# Altium PCB Sonar_board.PcbDoc (part 2 of 2)
Units mm, origin at the board's own origin, x right, y up, seen from the top; angles counter-clockwise.
Board outline 152.4 x 101.6 mm, 4 copper layers (Top Layer, Ground Plane, Power Plane, Bottom Layer), stack 0.462 mm thick; 156 components, 157 nets, 762 pads, 215 vias.
Unrouted connection lines stored in the file: 227.
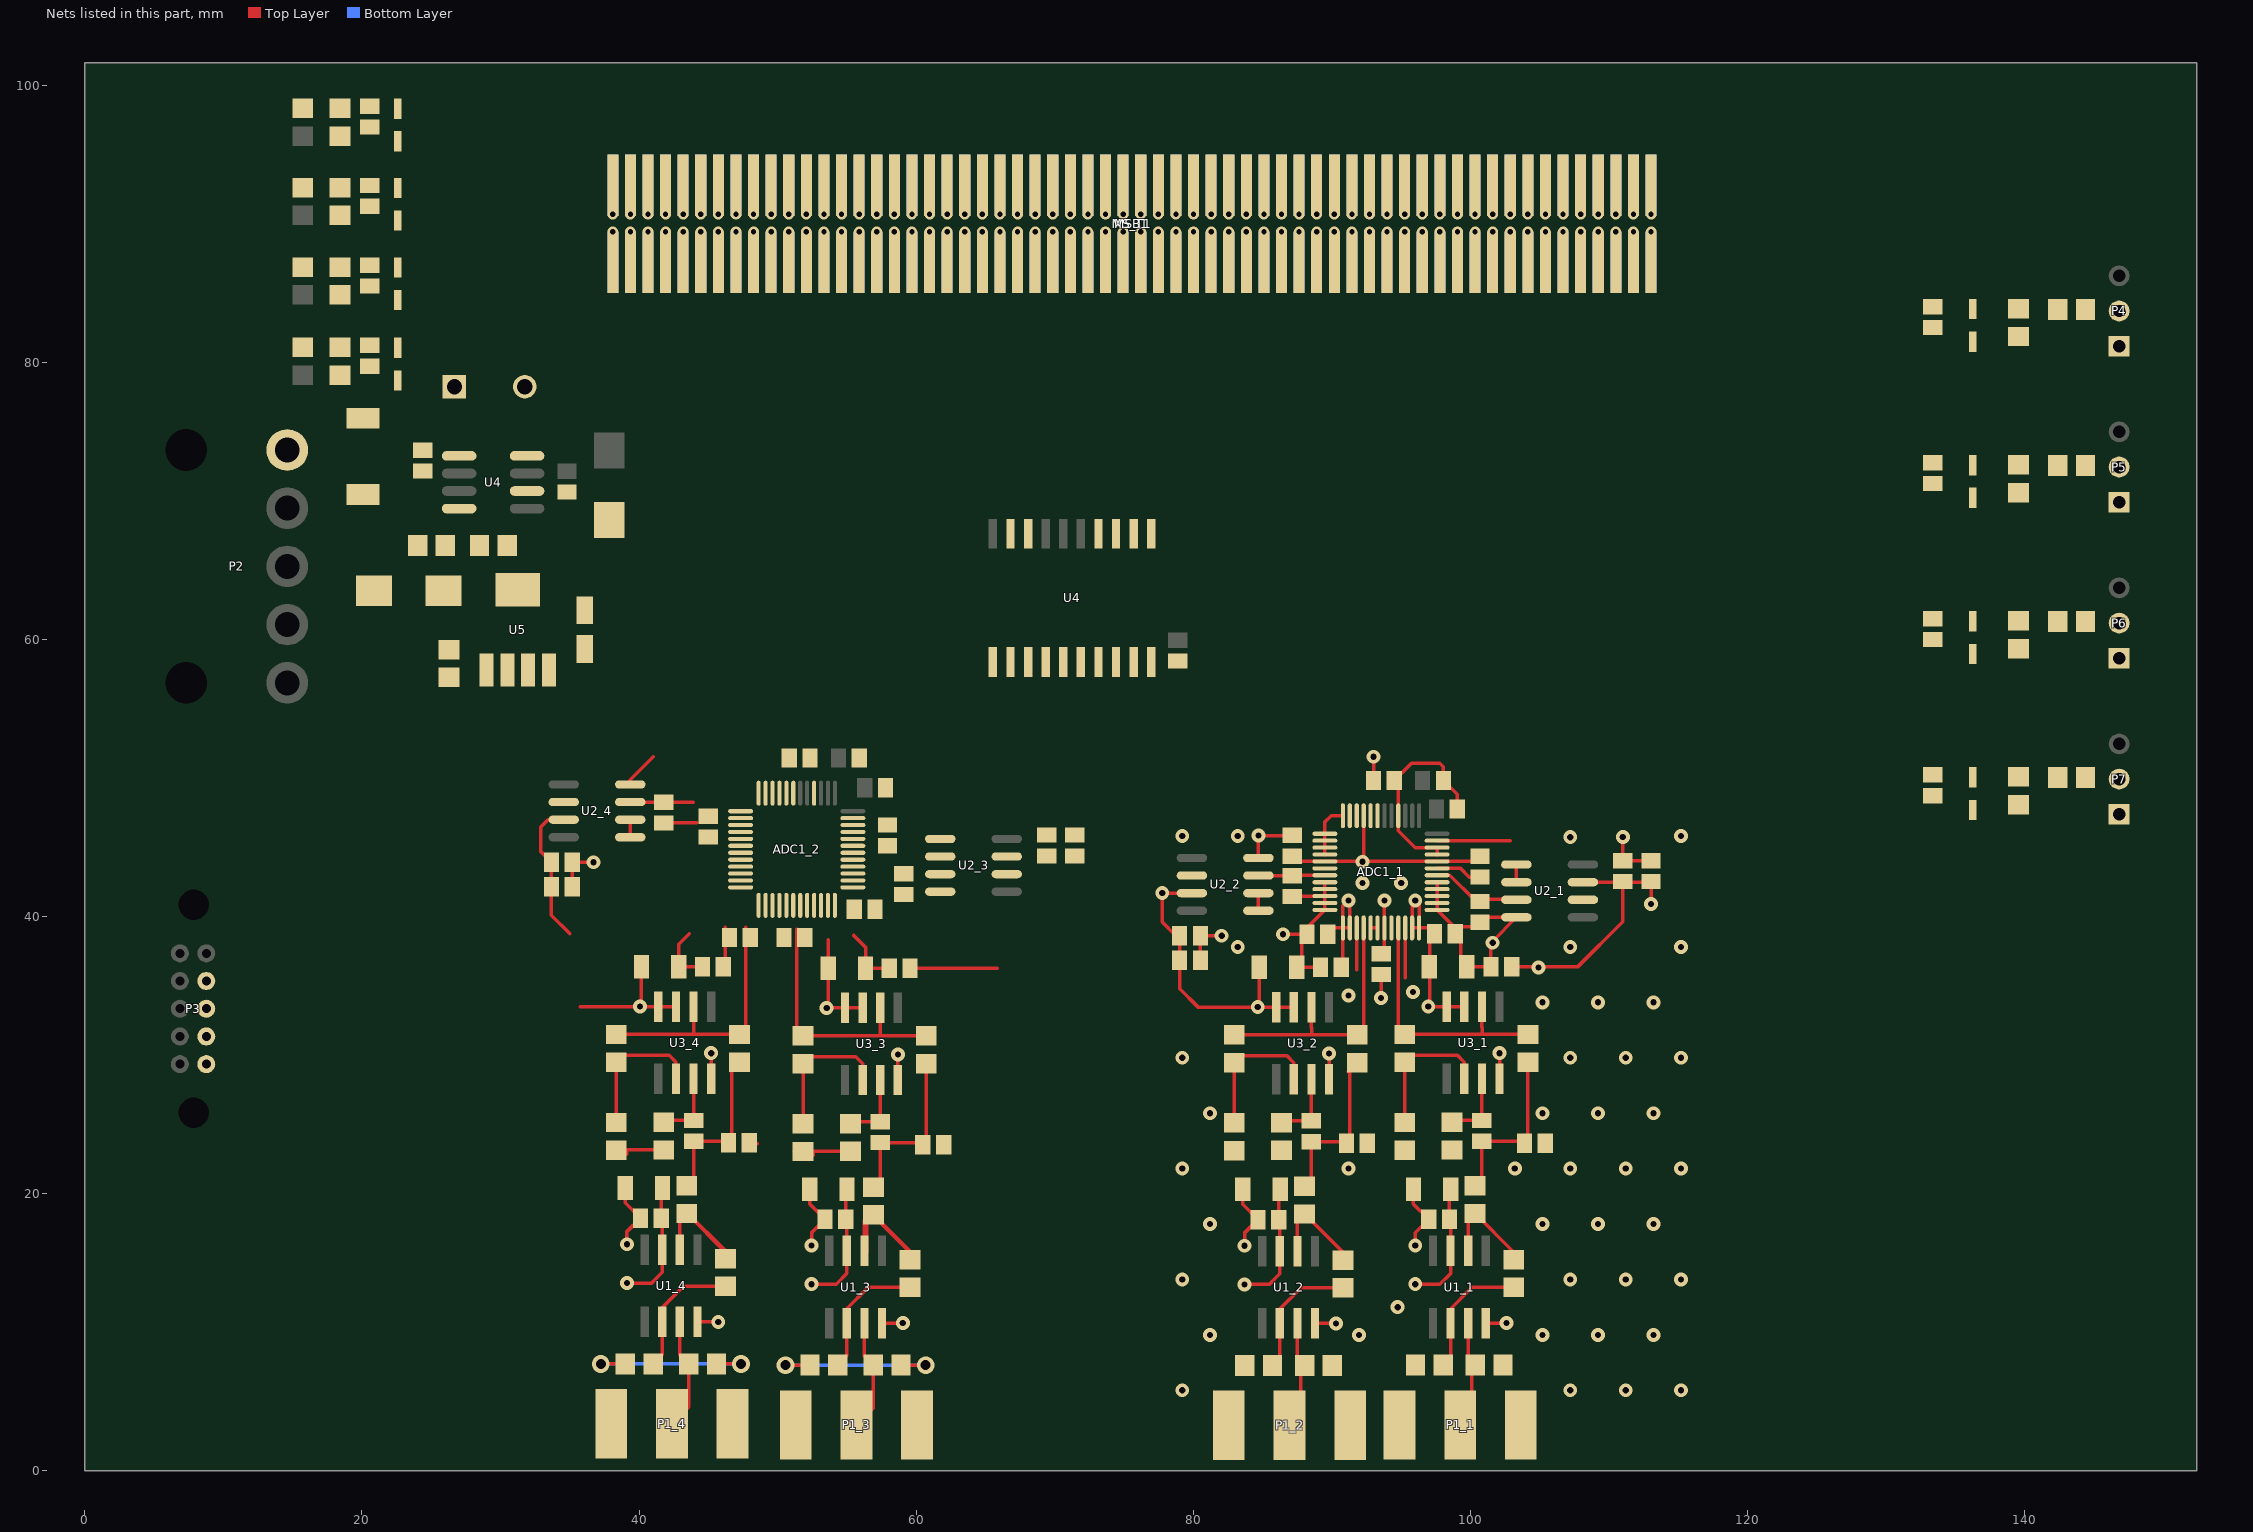
[diagram p4: the nets of this part, all layers, seen from the top]

## Via types
v1: diameter 0.762, hole 0.381, Top Layer to Bottom Layer, 120 vias
v2: diameter 1, hole 0.45, Top Layer to Bottom Layer, 44 vias
v3: diameter 1, hole 0.45, Top Layer to Ground Plane, 22 vias
v4: diameter 1, hole 0.45, Top Layer to Power Plane, 17 vias
v5: diameter 3.556, hole 3.556, Top Layer to Bottom Layer, 4 vias
v6: diameter 1.9, hole 1.9, Top Layer to Bottom Layer, 4 vias
v7: diameter 1.27, hole 0.711, Top Layer to Bottom Layer, 4 vias

## Nets (pads, with @x,y where several pads share a name; then routed paths per layer and width w, separated by ;. In a path a pad name is that pad's centre, name@x,y a point inside that pad or via, vN(x,y) a via of type N, cw(c..) or ccw(c..) an arc to the next point about the centre after c; other vN are vias at no path point) (continued)
DGND: ADC1_1.21 ADC1_1.22 ADC1_1.28 ADC1_1.36 ADC1_1.37 ADC1_1.38 ADC1_1.39 ADC1_1.40 ADC1_2.21 ADC1_2.22 ADC1_2.28 ADC1_2.36 ADC1_2.37 ADC1_2.38 ADC1_2.39 ADC1_2.40 C8_1.1 C8_2.1 C9_1.1 C9_2.1 C10_1.1 C10_2.1 C18.1 MS_T1.1 MS_T1.2 MS_T1.7 MS_T1.8 MS_T1.15 MS_T1.22 MS_T1.29 MS_T1.36 MS_T1.43 MS_T1.50 MS_T1.57 MS_T1.60 MS_T1.61 MS_T1.64 MS_T1.71 MS_T1.78 MS_T1.85 MS_T1.92 MS_T1.99 MS_T1.106 MS_T1.113 MS_T1.114 MS_T1.119 MS_T1.120 MSB1.1 MSB1.2 MSB1.7 MSB1.8 MSB1.15 MSB1.22 MSB1.29 MSB1.36 MSB1.43 MSB1.50 MSB1.57 MSB1.60 MSB1.61 MSB1.64 MSB1.71 MSB1.78 MSB1.85 MSB1.92 MSB1.99 MSB1.106 MSB1.113 MSB1.114 MSB1.119 MSB1.120 U4.3@68.072,58.367 U4.4@69.342,58.367 U4.5@70.612,58.367 U4.10 | length 19
  Top Layer w0.254: ADC1_1.40@89.491,44.468 ADC1_1.39@89.491,44.968 ADC1_1.38@89.491,45.468 ADC1_1.37@89.491,45.968 89.491,46.819 89.94,47.268 ADC1_1.36@90.791,47.268 ; ADC1_1.21@97.591,44.468 ADC1_1.22@97.591,44.968 96.002,44.968 94.791,46.179 ADC1_1.28@94.791,47.268 94.791,49.518 C8_1.1@94.501,49.808 95.747,51.054 97.79,51.054 98.045,50.799 C9_1.1@98.045,49.808 99.048,48.805 C10_1.1@99.048,47.752
  other v1: 38.1,89.408 41.91,89.408 50.8,89.408 59.69,89.408 68.58,89.408 77.47,89.408 86.36,89.408 95.25,89.408 104.14,89.408 105.41,89.408 111.76,89.408 113.03,89.408 38.1,90.678 41.91,90.678 50.8,90.678 59.69,90.678 68.58,90.678 77.47,90.678 86.36,90.678 95.25,90.678 104.14,90.678 105.41,90.678 111.76,90.678 113.03,90.678
GND: ADC1_1.5 ADC1_1.6 ADC1_1.8 ADC1_1.13 ADC1_1.14 ADC1_1.15 ADC1_1.16 ADC1_1.17 ADC1_1.19 ADC1_1.42 ADC1_1.44 ADC1_1.45 ADC1_1.46 ADC1_1.47 ADC1_1.48 ADC1_2.5 ADC1_2.6 ADC1_2.8 ADC1_2.13 ADC1_2.14 ADC1_2.15 ADC1_2.16 ADC1_2.17 ADC1_2.19 ADC1_2.42 ADC1_2.44 ADC1_2.45 ADC1_2.46 ADC1_2.47 ADC1_2.48 C1_1.1 C1_2.1 C1_3.1 C1_4.1 C2_1.1 C2_2.1 C2_3.1 C2_4.1 C3_1.1 C3_2.1 C4_1.1 C4_2.1 C5_1.1 C5_2.1 C6_1.1 C6_2.1 C7_1.1 C7_2.1 C11_1.1 C11_2.1 C11_3.1 C11_4.1 C12_1.1 C12_2.1 C12_3.1 C12_4.1 C13_1.1 C13_2.1 C13_3.1 C13_4.1 C14_1.1 C14_2.1 C14_3.1 C14_4.1 C15_1.1 C15_2.1 C15_3.1 C15_4.1 C21.1@34.798,70.624 C22.2 C23.2 C24.1@133.36,82.499 C24.2@36.068,62.106 C25.1 C26.1 C27.1 C28.1 C29.1 C30.1 C31.1 D1.3 D2.1 D3.1 D4.1 D5.1 D6.1 D7.1 D8.1 D9.1 P2.1 P3.10 P4.1 P5.1 P6.1 P7.1 R8.1 R13.1 R16.1 R17.1 R20.1 R21.1 R23.1 R25.1 R27.1 U1_1.4 U1_2.4 U1_3.4 U1_4.4 U2_1.4 U2_2.4 U2_3.4 U2_4.4 U3_1.4 U3_2.4 U3_3.4 U3_4.4 U4.6@31.914,70.699 U5.5 | length 97.9
  Top Layer w0.254: C12_4.1@35.167,42.132 C11_4.1@35.167,43.91 v3(36.703,43.91) ; C2_4.1@38.991,20.4 38.991,19.33 C1_4.1@40.093,18.228 39.122,17.257 v3(39.122,16.336) ; U2_4.4@39.357,49.523 39.357,49.866 41.009,51.518 ; C13_4.1@41.812,46.77 44.152,46.77 ; 43.607,38.744 42.867,38.004 C15_4.1@42.867,36.354 C14_4.1@44.577,36.354 ; U1_4.4@44.212,10.735 v3(45.713,10.735) ; U3_4.4@45.2,28.293 v3(45.2,30.131) ; C2_3.1@52.31,20.32 52.31,19.25 C1_3.1@53.412,18.148 52.441,17.177 v3(52.441,16.256) ; 55.474,38.636 56.341,37.769 C15_3.1@56.341,36.255 C14_3.1@58.051,36.255 ; U1_3.4@57.531,10.655 v3(59.032,10.655) ; U3_3.4@58.674,28.194 v3(58.674,30.032) ; C12_2.1@80.506,36.83 C11_2.1@80.506,38.608 v3(82.042,38.608) ; C2_2.1@83.562,20.295 83.562,19.225 C1_2.1@84.664,18.123 83.693,17.152 v3(83.693,16.231) ; U2_2.4@84.696,44.221 v3(84.696,45.834) 86.994,45.834 C4_1.1@87.122,45.962 ; v3(86.464,38.712) C3_1.1@88.196,38.712 ; C13_2.1@87.151,41.468 ADC1_1.46@89.491,41.468 ; C3_1.1@87.884,38.4 C3_1.1@88.196,38.712 ; U1_2.4@88.783,10.63 v3(90.284,10.63) ; C14_2.1@89.166,36.322 C15_2.1@87.456,36.322 87.82,37 87.82,38.4 C3_1.1@88.196,38.712 ; ADC1_1.44@89.491,42.468 ADC1_1.45@89.491,41.968 ADC1_1.46@89.491,41.468 ; U3_2.4@89.789,28.261 v3(89.789,30.099) ; ADC1_1.5@92.791,39.168 ADC1_1.6@93.283,39.168 ; v3(93.548,34.112) C6_1.1@93.548,35.806 ; C2_1.1@95.881,20.32 95.881,19.25 C1_1.1@96.983,18.148 96.012,17.177 v3(96.012,16.256) ; ADC1_1.17@97.591,42.468 ADC1_1.16@97.591,41.968 ADC1_1.15@97.591,41.468 ADC1_1.14@97.591,40.968 ADC1_1.13@97.591,40.468 C5_1.1@98.896,39.163 ; ADC1_1.19@97.591,43.468 99.28,43.468 99.91,42.838 C7_1.1@100.684,42.838 ; C5_1.1@98.896,39.116 C5_1.1@98.896,38.735 99.31,38.33 99.31,36.817 C15_1.1@99.73,36.354 99.763,36.354 C14_1.1@101.473,36.354 v3@101.473,38.093 ; C5_1.1@98.896,39.246 C13_1.1@100.683,39.246 ; C13_1.1@100.683,39.401 100.683,39.932 U2_1.4@103.312,39.932 v3@101.6,38.22 ; U1_1.4@101.102,10.655 v3(102.603,10.655) ; U3_1.4@102.096,28.293 v3(102.096,30.131) ; v3(110.996,45.724) C11_1.1@110.996,44.016 C12_1.1@113.028,44.016 ; C3_1.1@88.196,38.712 88.196,39.173 ADC1_1.48@89.491,40.468 ADC1_1.47@89.491,40.968 ADC1_1.46@89.491,41.468
  other v3: 101.6,38.1 92.202,42.418 94.996,42.418
NetADC1_1_3: ADC1_1.3 C16_2.2 P1_2.2 R2_2.1 R3_2.2 R4_2.1 R6_2.2 U2_2.6 | length 3
  Top Layer w0.254: 91.791,36.165 ADC1_1.3@91.791,39.168
  other v2: 79.2,5.8 81.2,9.8 91.948,9.8 79.2,13.8 81.2,17.8 79.2,21.8 91.2,21.8 81.2,25.8 79.2,29.8 91.186,34.29 83.2,37.8 79.2,45.8 83.2,45.8
NetADC1_1_4: ADC1_1.4 R5_2.2 R8_2.2 U3_2.6 | length 18.8
  Top Layer w0.254: R5_2.2@82.943,31.448 88.531,31.448 ; U3_2.6@88.519,33.461 88.519,31.968 88.531,31.956 88.531,31.448 ; ADC1_1.4@92.291,39.168 92.291,31.906 R8_2.2@91.833,31.448 88.531,31.448
NetADC1_1_9: ADC1_1.9 R5_1.2 R8_1.2 U3_1.6 | length 18.8
  Top Layer w0.254: ADC1_1.9@94.791,39.168 94.791,31.939 R5_1.2@95.25,31.48 100.838,31.48 ; U3_1.6@100.826,33.493 100.826,32 100.838,31.988 100.838,31.48 ; R8_1.2@104.14,31.48 100.838,31.48
NetADC1_1_10: ADC1_1.10 C16_1.2 P1_1.2 R2_1.1 R3_1.2 R4_1.1 R6_1.2 U2_1.6 | length 3.6
  Top Layer w0.254: 95.291,35.56 ADC1_1.10@95.291,39.168
  other v2: 107.2,5.8 111.2,5.8 115.2,5.8 105.2,9.8 109.2,9.8 113.2,9.8 94.742,11.8 107.2,13.8 111.2,13.8 115.2,13.8 105.2,17.8 109.2,17.8 113.2,17.8 103.2,21.8 107.2,21.8 111.2,21.8 115.2,21.8 105.2,25.8 109.2,25.8 113.2,25.8 107.2,29.8 111.2,29.8 115.2,29.8 105.2,33.8 109.2,33.8 113.2,33.8 95.85,34.55 107.2,37.8 115.2,37.8 107.2,45.72 115.2,45.8
NetADC1_1_18: ADC1_1.18 C13_1.2 U2_1.3 | length 6.3
  Top Layer w0.254: ADC1_1.18@97.591,42.968 98.51,42.968 C13_1.2@100.33,41.148 ; C13_1.2@100.403,41.075 C13_1.2@100.683,41.075 ; C13_1.2@100.683,41.222 U2_1.3@103.165,41.222
NetADC1_1_23: ADC1_1.23 MS_T1.98 MSB1.23 | length 5.3
  Top Layer w0.254: ADC1_1.23@97.591,45.468 102.872,45.468
  other v1: 85.09,89.408
NetADC1_1_31: ADC1_1.31 U4.9
NetADC1_1_32: ADC1_1.32 U4.8@74.422,58.367
NetADC1_1_34: ADC1_1.34 MS_T1.96 MSB1.25
  other v1: 82.55,89.408
NetADC1_1_35: ADC1_1.35 MS_T1.97 MSB1.24
  other v1: 83.82,89.408
NetADC1_1_43: ADC1_1.43 C13_2.2 U2_2.3 | length 4.8
  Top Layer w0.254: U2_2.3@84.708,42.939 C13_2.2@87.122,42.939 ; C13_2.2@87.151,42.968 ADC1_1.43@89.491,42.968
NetADC1_2_3: ADC1_2.3 C16_4.2 P1_4.2 R2_4.1 R3_4.2 R4_4.1 R6_4.2 U2_4.6 | length 18
  Top Layer w0.254: v7(37.242,7.7) R2_4.1@39.011,7.7 ; R4_4.1@37.723,23.13 R4_4.1@38.354,23.13 R4_4.1@37.846,22.622 ; R4_4.1@39.104,22.848 39.104,23.146 R6_4.2@41.771,23.146 ; R3_4.2@45.583,7.7 v7(47.352,7.7) ; C16_4.2@48.502,23.622 48.514,23.61
  Bottom Layer w0.254: v7(37.242,7.7) v7(47.352,7.7)
NetADC1_2_4: ADC1_2.4 R5_4.2 R8_4.2 U3_4.6 | length 18.7
  Top Layer w0.254: R5_4.2@37.895,31.939 R5_4.2@38.354,31.48 ; 39.116,31.48 43.942,31.48 ; U3_4.6@43.93,33.493 43.93,32 43.942,31.988 43.942,31.48 ; 47.702,39.2 47.702,31.938 R8_4.2@47.244,31.48 43.942,31.48
NetADC1_2_9: ADC1_2.9 R5_3.2 R8_3.2 U3_3.6 | length 18.7
  Top Layer w0.254: 51.369,39.069 51.369,31.84 R5_3.2@51.828,31.381 ; 52.59,31.381 57.416,31.381 ; U3_3.6@57.404,33.394 57.404,31.901 57.416,31.889 57.416,31.381 ; R8_3.2@61.176,31.839 R8_3.2@60.718,31.381 57.416,31.381
NetADC1_2_10: ADC1_2.10 C16_3.2 P1_3.2 R2_3.1 R3_3.2 R4_3.1 R6_3.2 U2_3.6 | length 18
  Top Layer w0.254: v7(50.561,7.62) R2_3.1@52.33,7.62 ; R4_3.1@51.197,23.031 R4_3.1@51.828,23.031 R4_3.1@51.32,22.523 ; R4_3.1@52.578,22.749 52.578,23.047 R6_3.2@55.245,23.047 ; R3_3.2@58.902,7.62 v7(60.671,7.62) ; C16_3.2@61.976,23.523 C16_3.2@61.988,23.511
  Bottom Layer w0.254: v7(50.561,7.62) v7(60.671,7.62)
NetADC1_2_18: ADC1_2.18 C13_3.2 U2_3.3
NetADC1_2_23: ADC1_2.23 MS_T1.87 MSB1.34
  other v1: 71.12,89.408
NetADC1_2_31: ADC1_2.31 U4.7@73.152,58.367
NetADC1_2_32: ADC1_2.32 U4.6@71.882,58.367
NetADC1_2_34: ADC1_2.34 MS_T1.84 MSB1.37
  other v1: 67.31,89.408
NetADC1_2_35: ADC1_2.35 MS_T1.86 MSB1.35
  other v1: 69.85,89.408
NetADC1_2_43: ADC1_2.43 C13_4.2 U2_4.3 | length 4.5
  Top Layer w0.254: U2_4.3@39.369,48.241 C13_4.2@41.783,48.241 43.894,48.241
NetC16_1_1: C16_1.1 C17_1.2 R7_1.2 R8_1.1 | length 11.7
  Top Layer w0.254: R7_1.2@100.33,20.558 100.826,21.054 C17_1.2@100.826,23.777 103.743,23.777 104.14,24.174 R8_1.1@104.14,28.972
NetC16_2_1: C16_2.1 C17_2.2 R7_2.2 R8_2.1 | length 12
  Top Layer w0.254: R7_2.2@88.023,20.526 88.519,21.022 C17_2.2@88.519,23.745 91.055,23.745 91.286,23.976 R8_2.1@91.286,28.801 ; R8_2.1@91.186,28.801 R8_2.1@91.833,29.448
NetC16_3_1: C16_3.1 C17_3.2 R7_3.2 R8_3.1 | length 11.7
  Top Layer w0.254: R7_3.2@56.908,20.459 57.404,20.955 C17_3.2@57.404,23.678 60.321,23.678 60.718,24.075 R8_3.1@60.718,28.873
NetC16_4_1: C16_4.1 C17_4.2 R7_4.2 R8_4.1 | length 12
  Top Layer w0.254: R7_4.2@43.434,20.558 43.93,21.054 C17_4.2@43.93,23.777 46.466,23.777 46.697,24.008 R8_4.1@46.697,28.833 ; R8_4.1@46.597,28.833 R8_4.1@47.244,29.48
NetC17_1_1: C17_1.1 R6_1.1 U3_1.3 | length 5
  Top Layer w0.254: R6_1.1@98.798,25.277 C17_1.1@100.826,25.277 U3_1.3@100.826,28.293
NetC17_2_1: C17_2.1 R6_2.1 U3_2.3 | length 5
  Top Layer w0.254: R6_2.1@86.491,25.245 C17_2.1@88.519,25.245 U3_2.3@88.519,28.261
NetC17_3_1: C17_3.1 R6_3.1 U3_3.3 | length 5
  Top Layer w0.254: R6_3.1@55.376,25.178 C17_3.1@57.404,25.178 U3_3.3@57.404,28.194
NetC17_4_1: C17_4.1 R6_4.1 U3_4.3 | length 5
  Top Layer w0.254: R6_4.1@41.902,25.277 C17_4.1@43.93,25.277 U3_4.3@43.93,28.293
NetC21_1: C21.1@24.384,72.148 U4.1@27.014,73.239
NetC21_2: C21.2@24.384,73.648 D1.1 L1.1 U4.8@31.914,73.239
NetC23_1: C23.1 L1.2 R6.2 R7.1 U5.2
NetC24_2: C24.2@133.36,83.999 D2.2 MS_T1.118 MSB1.3 R12.2 R13.2
  other v1: 110.49,89.408
NetC25_2: C25.2 D3.2 MS_T1.3 MSB1.118 R14.2 R16.2
  other v1: 110.49,90.678
NetC26_2: C26.2 D4.2 MS_T1.117 MSB1.4 R15.2 R17.2
  other v1: 109.22,89.408
NetC27_2: C27.2 D5.2 MS_T1.4 MSB1.117 R18.2 R20.2
  other v1: 109.22,90.678
NetC28_2: C28.2 D6.2 MS_T1.116 MSB1.5 R19.2 R21.2
  other v1: 107.95,89.408
NetC29_2: C29.2 D7.2 MS_T1.5 MSB1.116 R22.2 R23.2
  other v1: 107.95,90.678
NetC30_2: C30.2 D8.2 MS_T1.115 MSB1.6 R24.2 R25.2
  other v1: 106.68,89.408
NetC31_2: C31.2 D9.2 MS_T1.6 MSB1.115 R26.2 R27.2
  other v1: 106.68,90.678
NetMS_T1_9: MS_T1.9 MSB1.112
  other v1: 102.87,90.678
NetMS_T1_10: MS_T1.10 MSB1.111
  other v1: 101.6,90.678
NetMS_T1_11: MS_T1.11 MSB1.110
  other v1: 100.33,90.678
NetMS_T1_12: MS_T1.12 MSB1.109
  other v1: 99.06,90.678
NetMS_T1_13: MS_T1.13 MSB1.108
  other v1: 97.79,90.678
NetMS_T1_14: MS_T1.14 MSB1.107
  other v1: 96.52,90.678
NetMS_T1_16: MS_T1.16 MSB1.105
  other v1: 93.98,90.678
NetMS_T1_17: MS_T1.17 MSB1.104
  other v1: 92.71,90.678
NetMS_T1_18: MS_T1.18 MSB1.103
  other v1: 91.44,90.678
NetMS_T1_19: MS_T1.19 MSB1.102
  other v1: 90.17,90.678
NetMS_T1_20: MS_T1.20 MSB1.101
  other v1: 88.9,90.678
NetMS_T1_21: MS_T1.21 MSB1.100
  other v1: 87.63,90.678
NetMS_T1_23: MS_T1.23 MSB1.98
  other v1: 85.09,90.678
NetMS_T1_24: MS_T1.24 MSB1.97
  other v1: 83.82,90.678
NetMS_T1_25: MS_T1.25 MSB1.96
  other v1: 82.55,90.678
NetMS_T1_26: MS_T1.26 MSB1.95
  other v1: 81.28,90.678
NetMS_T1_27: MS_T1.27 MSB1.94
  other v1: 80.01,90.678
NetMS_T1_28: MS_T1.28 MSB1.93
  other v1: 78.74,90.678
NetMS_T1_30: MS_T1.30 MSB1.91
  other v1: 76.2,90.678
NetMS_T1_31: MS_T1.31 MSB1.90
  other v1: 74.93,90.678
NetMS_T1_32: MS_T1.32 MSB1.89
  other v1: 73.66,90.678
NetMS_T1_33: MS_T1.33 MSB1.88
  other v1: 72.39,90.678
NetMS_T1_34: MS_T1.34 MSB1.87
  other v1: 71.12,90.678
NetMS_T1_35: MS_T1.35 MSB1.86
  other v1: 69.85,90.678
NetMS_T1_37: MS_T1.37 MSB1.84
  other v1: 67.31,90.678
NetMS_T1_38: MS_T1.38 MSB1.83
  other v1: 66.04,90.678
NetMS_T1_39: MS_T1.39 MSB1.82
  other v1: 64.77,90.678
NetMS_T1_40: MS_T1.40 MSB1.81
  other v1: 63.5,90.678
NetMS_T1_41: MS_T1.41 MSB1.80
  other v1: 62.23,90.678
NetMS_T1_42: MS_T1.42 MSB1.79
  other v1: 60.96,90.678
NetMS_T1_44: MS_T1.44 MSB1.77
  other v1: 58.42,90.678
NetMS_T1_45: MS_T1.45 MSB1.76
  other v1: 57.15,90.678
NetMS_T1_46: MS_T1.46 MSB1.75
  other v1: 55.88,90.678
NetMS_T1_47: MS_T1.47 MSB1.74
  other v1: 54.61,90.678
NetMS_T1_48: MS_T1.48 MSB1.73
  other v1: 53.34,90.678
NetMS_T1_49: MS_T1.49 MSB1.72
  other v1: 52.07,90.678
NetMS_T1_51: MS_T1.51 MSB1.70
  other v1: 49.53,90.678
NetMS_T1_52: MS_T1.52 MSB1.69
  other v1: 48.26,90.678
NetMS_T1_53: MS_T1.53 MSB1.68
  other v1: 46.99,90.678
NetMS_T1_54: MS_T1.54 MSB1.67
  other v1: 45.72,90.678
NetMS_T1_55: MS_T1.55 MSB1.66
  other v1: 44.45,90.678
NetMS_T1_56: MS_T1.56 MSB1.65
  other v1: 43.18,90.678
NetMS_T1_58: MS_T1.58 MSB1.63
  other v1: 40.64,90.678
NetMS_T1_59: MS_T1.59 MSB1.62
  other v1: 39.37,90.678
NetMS_T1_62: MS_T1.62 MSB1.59
  other v1: 39.37,89.408
NetMS_T1_63: MS_T1.63 MSB1.58
  other v1: 40.64,89.408
NetMS_T1_65: MS_T1.65 MSB1.56
  other v1: 43.18,89.408
NetMS_T1_66: MS_T1.66 MSB1.55
  other v1: 44.45,89.408
NetMS_T1_67: MS_T1.67 MSB1.54
  other v1: 45.72,89.408
NetMS_T1_68: MS_T1.68 MSB1.53
  other v1: 46.99,89.408
NetMS_T1_69: MS_T1.69 MSB1.52
  other v1: 48.26,89.408
NetMS_T1_70: MS_T1.70 MSB1.51
  other v1: 49.53,89.408
NetMS_T1_72: MS_T1.72 MSB1.49
  other v1: 52.07,89.408
NetMS_T1_73: MS_T1.73 MSB1.48
  other v1: 53.34,89.408
NetMS_T1_74: MS_T1.74 MSB1.47
  other v1: 54.61,89.408
NetMS_T1_75: MS_T1.75 MSB1.46
  other v1: 55.88,89.408
NetMS_T1_76: MS_T1.76 MSB1.45
  other v1: 57.15,89.408
NetMS_T1_77: MS_T1.77 MSB1.44
  other v1: 58.42,89.408
NetMS_T1_79: MS_T1.79 MSB1.42
  other v1: 60.96,89.408
NetMS_T1_80: MS_T1.80 MSB1.41
  other v1: 62.23,89.408
NetMS_T1_81: MS_T1.81 MSB1.40
  other v1: 63.5,89.408
NetMS_T1_82: MS_T1.82 MSB1.39 P3.9
  other v1: 64.77,89.408
NetMS_T1_83: MS_T1.83 MSB1.38 P3.7
  other v1: 66.04,89.408
NetMS_T1_88: MS_T1.88 MSB1.33 U4.18
  other v1: 72.39,89.408
NetMS_T1_89: MS_T1.89 MSB1.32 U4.14
  other v1: 73.66,89.408
NetMS_T1_90: MS_T1.90 MSB1.31 U4.19
  other v1: 74.93,89.408
NetMS_T1_91: MS_T1.91 MSB1.30 U4.13
  other v1: 76.2,89.408
NetMS_T1_93: MS_T1.93 MSB1.28 U4.12
  other v1: 78.74,89.408
NetMS_T1_94: MS_T1.94 MSB1.27 U4.1@65.532,58.367
  other v1: 80.01,89.408
NetMS_T1_95: MS_T1.95 MSB1.26 U4.11
  other v1: 81.28,89.408
NetMS_T1_100: MS_T1.100 MSB1.21
  other v1: 87.63,89.408
NetMS_T1_101: MS_T1.101 MSB1.20
  other v1: 88.9,89.408
NetMS_T1_102: MS_T1.102 MSB1.19
  other v1: 90.17,89.408
NetMS_T1_103: MS_T1.103 MSB1.18
  other v1: 91.44,89.408
NetMS_T1_104: MS_T1.104 MSB1.17
  other v1: 92.71,89.408
NetMS_T1_105: MS_T1.105 MSB1.16
  other v1: 93.98,89.408
NetMS_T1_107: MS_T1.107 MSB1.14
  other v1: 96.52,89.408
NetMS_T1_108: MS_T1.108 MSB1.13
  other v1: 97.79,89.408
NetMS_T1_109: MS_T1.109 MSB1.12
  other v1: 99.06,89.408
NetMS_T1_110: MS_T1.110 MSB1.11
  other v1: 100.33,89.408
NetMS_T1_111: MS_T1.111 MSB1.10
  other v1: 101.6,89.408
NetMS_T1_112: MS_T1.112 MSB1.9
  other v1: 102.87,89.408
NetP1_1_1: P1_1.1 R3_1.1 U1_1.3 | length 8.2
  Top Layer w0.254: P1_1.1@99.257,3.302 100.085,4.13 100.085,7.375 100.33,7.62 100.473,7.62 99.832,8.261 U1_1.3@99.832,10.655
NetP1_2_1: P1_2.1 R3_2.1 U1_2.3 | length 8.2
  Top Layer w0.254: P1_2.1@86.938,3.277 87.766,4.105 87.766,7.35 88.011,7.595 88.154,7.595 87.513,8.236 U1_2.3@87.513,10.63
NetP1_3_1: P1_3.1 R3_3.1 U1_3.3 | length 8.1
  Top Layer w0.254: P1_3.1@55.686,3.302 56.902,4.518 R3_3.1@56.902,7.62 56.261,8.261 U1_3.3@56.261,10.655
NetP1_4_1: P1_4.1 R3_4.1 U1_4.3 | length 8.1
  Top Layer w0.254: P1_4.1@42.367,3.382 43.583,4.598 43.583,7.7 42.942,8.341 U1_4.3@42.942,10.735
NetP3_8: P3.8 U4.2@66.802,58.367
NetP4_2: P4.2 R12.1
NetP5_2: P5.2 R15.1
NetP6_2: P6.2 R19.1
NetP7_2: P7.2 R24.1
NetR1_1_1: R1_1.1 R2_1.2 U1_1.2 | length 9.5
  Top Layer w0.254: R2_1.2@97.901,7.62 98.562,8.281 U1_1.2@98.562,10.655 98.562,11.694 100.092,13.224 R1_1.1@103.124,13.224
NetR1_1_2: R1_1.2 R7_1.1 U1_1.6 | length 7.4
  Top Layer w0.254: U1_1.6@99.832,15.855 99.832,18.06 R7_1.1@100.33,18.558 ; R7_1.1@100.338,18.558 103.124,15.772 R1_1.2@103.124,15.224
NetR1_2_1: R1_2.1 R2_2.2 U1_2.2 | length 9.5
  Top Layer w0.254: R2_2.2@85.582,7.595 86.243,8.256 U1_2.2@86.243,10.63 86.243,11.669 87.773,13.199 R1_2.1@90.805,13.199
NetR1_2_2: R1_2.2 R7_2.1 U1_2.6 | length 7.4
  Top Layer w0.254: U1_2.6@87.513,15.83 87.513,18.035 R7_2.1@88.011,18.533 ; R7_2.1@88.019,18.533 90.805,15.747 R1_2.2@90.805,15.199
NetR1_3_1: R1_3.1 R2_3.2 U1_3.2 | length 9.5
  Top Layer w0.254: R2_3.2@54.33,7.62 54.991,8.281 U1_3.2@54.991,10.655 54.991,11.694 56.521,13.224 R1_3.1@59.553,13.224
NetR1_3_2: R1_3.2 R7_3.1 U1_3.6 | length 13.5
  Top Layer w0.254: U1_3.6@56.261,15.855 R7_3.1@56.261,18.06 ; U1_3.6@56.41,15.756 56.41,17.961 R7_3.1@56.908,18.459 ; R7_3.1@56.767,18.558 59.553,15.772 R1_3.2@59.553,15.224 ; R7_3.1@56.916,18.459 R1_3.2@59.702,15.673
NetR1_4_1: R1_4.1 R2_4.2 U1_4.2 | length 9.5
  Top Layer w0.254: R2_4.2@41.011,7.7 41.672,8.361 U1_4.2@41.672,10.735 41.672,11.774 43.202,13.304 R1_4.1@46.234,13.304
NetR1_4_2: R1_4.2 R7_4.1 U1_4.6 | length 13.5
  Top Layer w0.254: U1_4.6@42.924,15.862 R7_4.1@42.924,18.067 ; R7_4.1@42.936,18.06 R7_4.1@43.434,18.558 ; U1_4.6@42.942,15.935 R7_4.1@42.942,18.14 ; R7_4.1@43.43,18.565 R1_4.2@46.216,15.779 ; R7_4.1@43.448,18.638 46.234,15.852 R1_4.2@46.234,15.304
NetR4_1_2: R4_1.2 R5_1.1 U3_1.2 | length 10.2
  Top Layer w0.254: R4_1.2@95.25,25.13 R5_1.1@95.25,29.48 95.742,29.972 99.06,29.972 99.556,29.476 U3_1.2@99.556,28.293
NetR4_2_2: R4_2.2 R5_2.1 U3_2.2 | length 10.2
  Top Layer w0.254: R4_2.2@82.943,25.098 R5_2.1@82.943,29.448 83.435,29.94 86.753,29.94 87.249,29.444 U3_2.2@87.249,28.261
NetR4_3_2: R4_3.2 R5_3.1 U3_3.2 | length 10.2
  Top Layer w0.254: R4_3.2@51.828,25.031 R5_3.1@51.828,29.381 52.32,29.873 55.638,29.873 56.134,29.377 U3_3.2@56.134,28.194
NetR4_4_2: R4_4.2 R5_4.1 U3_4.2 | length 10.2
  Top Layer w0.254: R4_4.2@38.354,25.13 R5_4.1@38.354,29.48 38.846,29.972 42.164,29.972 42.66,29.476 U3_4.2@42.66,28.293
NetR6_1: R6.1 R8.2 U4.4@27.014,69.429
NetR7_2: R7.2 U5.1
NetU2_1_1: U2_1.1 U2_1.2 | length 1.3
  Top Layer w0.254: U2_1.2@103.312,42.345 U2_1.1@103.312,43.615
NetU2_2_1: U2_2.1 U2_2.2 | length 1.3
  Top Layer w0.254: U2_2.1@84.696,40.411 U2_2.2@84.696,41.681
NetU2_3_1: U2_3.1 U2_3.2
NetU2_4_1: U2_4.1 U2_4.2 | length 1.3
  Top Layer w0.254: U2_4.1@39.357,45.713 U2_4.2@39.357,46.983
VCC: ADC1_1.1 ADC1_1.2 ADC1_1.7 ADC1_1.11 ADC1_1.12 ADC1_1.20 ADC1_1.33 ADC1_1.41 ADC1_2.1 ADC1_2.2 ADC1_2.7 ADC1_2.11 ADC1_2.12 ADC1_2.20 ADC1_2.33 ADC1_2.41 C1_1.2 C1_2.2 C1_3.2 C1_4.2 C2_1.2 C2_2.2 C2_3.2 C2_4.2 C3_1.2 C3_2.2 C4_1.2 C4_2.2 C5_1.2 C5_2.2 C6_1.2 C6_2.2 C7_1.2 C7_2.2 C8_1.2 C8_2.2 C11_1.2 C11_2.2 C11_3.2 C11_4.2 C12_1.2 C12_2.2 C12_3.2 C12_4.2 C14_1.2 C14_2.2 C14_3.2 C14_4.2 C15_1.2 C15_2.2 C15_3.2 C15_4.2 C24.1@36.068,59.306 U1_1.7 U1_2.7 U1_3.7 U1_4.7 U2_1.7 U2_2.7 U2_3.7 U2_4.7 U3_1.7 U3_1.8 U3_2.7 U3_2.8 U3_3.7 U3_3.8 U3_4.7 U3_4.8 U5.3 U5.4 | length 157.5
  Top Layer w0.254: U2_4.7@34.557,46.983 33.426,46.983 32.893,46.45 32.893,44.684 C11_4.2@33.667,43.91 33.667,40.088 34.992,38.763 ; 35.742,33.493 v4(40.06,33.493) U3_4.7@42.66,33.493 ; v4(39.122,13.542) 40.9,13.542 41.672,14.314 41.672,18.149 C1_4.2@41.593,18.228 C2_4.2@41.593,20.302 ; v4@40.167,33.6 C15_4.2@40.167,36.354 ; C14_4.2@46.077,36.354 46.202,36.479 46.202,39.2 ; v4(52.441,13.462) 54.219,13.462 54.991,14.234 54.991,18.069 C1_3.2@54.912,18.148 C2_3.2@54.912,20.222 ; v4(53.534,33.394) U3_3.7@56.134,33.394 ; v4@53.641,33.501 C15_3.2@53.641,36.255 53.641,38.303 ; C14_3.2@59.551,36.255 65.83,36.255 ; U2_2.7@79.896,41.681 v4(77.749,41.681) 77.749,39.599 78.74,38.608 C11_2.2@79.006,38.608 C12_2.2@79.006,36.83 79.006,34.786 80.331,33.461 v4(84.649,33.461) U3_2.8@85.979,33.461 U3_2.7@87.249,33.461 ; v4(83.693,13.437) 85.471,13.437 86.243,14.209 86.243,18.044 C1_2.2@86.164,18.123 C2_2.2@86.164,20.197 ; v4@84.756,33.568 C15_2.2@84.756,36.322 ; C4_1.2@87.122,44.462 87.616,43.968 ADC1_1.41@89.491,43.968 v4@92.16,43.968 ; C3_1.2@89.696,38.712 90.152,39.168 ADC1_1.1@90.791,39.168 ; C14_2.2@90.666,36.322 90.791,36.447 ADC1_1.1@90.791,39.168 ; v4(91.186,41.148) 90.791,40.753 ADC1_1.1@90.791,39.168 ; ADC1_1.2@91.283,39.168 ADC1_1.1@90.791,39.168 ; ADC1_1.2@91.291,39.168 v4@91.291,41.043 ; v4@92.168,43.976 v4(92.202,43.942) ; ADC1_1.33@92.291,47.268 92.291,44.031 v4(92.202,43.942) ; C8_1.2@93.001,49.808 v4(93.001,51.525) ; C6_1.2@93.791,37.549 ADC1_1.7@93.791,39.168 v4(93.791,41.148) ; v4(96.012,13.462) 97.79,13.462 98.562,14.234 98.562,18.069 C1_1.2@98.483,18.148 C2_1.2@98.483,20.222 ; ADC1_1.12@96.266,39.193 ADC1_1.12@96.291,39.168 ; v4(96.956,33.493) U3_1.8@98.286,33.493 U3_1.7@99.556,33.493 ; v4@97.063,33.6 97.063,38.402 C5_1.2@97.396,38.735 96.963,39.168 ADC1_1.12@96.291,39.168 ; C7_1.2@100.684,44.338 100.314,43.968 ADC1_1.20@97.591,43.968 v4@92.16,43.968 ; C14_1.2@102.973,36.354 107.722,36.354 110.996,39.628 C11_1.2@110.996,42.472 ; U2_1.7@108.112,42.472 C11_1.2@110.996,42.472 ; C12_1.2@112.726,42.672 C12_1.2@112.726,42.716 ; C12_1.2@112.984,42.472 C11_1.2@110.996,42.472 ; v4(113.028,40.898) C12_1.2@113.028,42.516 ; v4@92.16,43.968 v4(92.202,43.942) ; ADC1_1.12@96.291,39.168 96.291,40.869 v4(96.012,41.148) 95.791,40.927 ADC1_1.11@95.791,39.168 ADC1_1.12@96.291,39.168
  other v4: 104.902,36.322
pads on no net: ADC1_1.25 ADC1_1.26 ADC1_1.29 ADC1_1.30 ADC1_2.25 ADC1_2.26 ADC1_2.29 ADC1_2.30 P2.0 P3.0 P3.1 P3.2 P3.3 P3.4 P3.5 U1_1.1 U1_1.5 U1_1.8 U1_2.1 U1_2.5 U1_2.8 U1_3.1 U1_3.5 U1_3.8 U1_4.1 U1_4.5 U1_4.8 U2_1.5 U2_1.8 U2_2.5 U2_2.8 U2_3.5 U2_3.8 U2_4.5 U2_4.8 U3_1.1 U3_1.5 U3_2.1 U3_2.5 U3_3.1 U3_3.5 U3_4.1 U3_4.5 U4.2@27.014,71.969 U4.3@27.014,70.699 U4.5@31.914,69.429 U4.15 U4.16 U4.17
copper on no net: | length 33.4
  Top Layer w0.254: 39.417,38.87 39.417,41.624 ; 56.776,41.573 59.106,41.573 ; 56.831,43.073 59.106,43.073 61.588,43.073 61.735,42.926 ; 59.316,41.783 61.735,41.783 v3(61.735,40.145) ; 61.735,44.196 61.735,45.466 ; 65.945,38.005 69.419,41.479 69.419,44.323 ; 66.535,44.323 69.419,44.323 ; 69.419,44.367 69.419,44.323 ; 69.419,47.575 69.419,45.867 71.451,45.867 ; 71.407,44.323 69.419,44.323 ; v4(71.451,42.749) 71.451,44.367
  other v5: 6.35,6.35 146.05,6.35 6.35,95.25 146.05,95.25
  other v6: 35.56,89.969 115.57,89.969 35.56,90.007 115.57,90.007

## Polygon pours and split planes (outlines as drawn)
NetADC1_1_10 on Top Layer "Vref_1" (solid, pour order 14): 95.179,33.668 96.52,33.343 96.52,37.084 95.179,37.084
GND on Top Layer "ADC_AGND" (solid, pour order 13): 89.491,43.688 89.491,39.168 97.591,39.168 97.591,43.688
NetADC1_1_10 on Top Layer "Vref_1" (solid, remove dead copper, pour order 17): 93.472,1.524 93.472,46.99 116.84,46.99 116.84,1.524
NetADC1_1_3 on Top Layer "Vref_2" (solid, remove dead copper, pour order 12): 74.93,46.99 93.218,46.99 93.218,1.778 74.93,1.778
GND on Top Layer "ADC_AGND" (solid, pour order 11): 91.44,43.434 91.44,41.91 95.758,41.91 95.758,43.434
NetADC1_1_3 on Top Layer "Vref_2" (solid, pour order 9): 91.902,32.402 91.902,35.368 90.896,35.368 90.343,34.815 90.343,32.402
NetADC1_1_3 on Bottom Layer "Vref_2" (solid, remove dead copper, pour order 16): 74.93,1.778 74.93,46.99 93.218,46.99 93.218,1.778
NetADC1_1_10 on Bottom Layer "Vref_1" (solid, remove dead copper, pour order 15): 93.472,1.778 93.472,46.99 116.84,46.99 116.84,1.778
GND on Ground Plane (split plane): 151.89,0.51 0.51,0.51 0.51,101.09 151.89,101.09
VCC on Power Plane (split plane): 151.89,0.51 0.51,0.51 0.51,101.09 151.89,101.09

## Keep-outs
Keep-Out Layer:
  lines w0.254: 1.27,1.27 1.27,100.33 151.13,100.33 151.13,1.27 1.27,1.27

## Other copper
Top Layer:
  region net GND: 97.591,39.689 98.37,39.689 97.591,40.468
  region net GND: 89.491,39.666 88.689,39.666 89.491,40.468
  region net NetADC1_1_4: 89.039,31.448 88.531,31.956 88.023,31.448
  region net NetADC1_1_9: 101.346,31.48 100.838,31.988 100.33,31.48
  region net NetADC1_2_4: 44.45,31.48 43.942,31.988 43.434,31.48
  region net NetADC1_2_9: 57.924,31.381 57.416,31.889 56.908,31.381
  pour cut-out: 85.344,46.99 85.344,39.832 86.464,38.712 88.646,38.712 88.646,46.99
  pour cut-out: 90.791,38.862 96.774,38.862 96.774,37.557 96.301,37.084 90.791,37.084

## Silkscreen, mask and mechanical layers (free items; w line width, h text height)
Drill Drawing:
  text ".LEGEND" at 109.347,-8.382 h1.52

## Dimensions
1.27,1.27 to 1.27,100.33 on Mechanical 1
1.27,1.27 to 151.13,1.27 on Mechanical 1

## Text inside footprints (layer, text, board x,y; h text height)
D1: Top Overlay "1" at 26.42,74.807 h1.5; Top Overlay "3" at 31.25,74.807 h1.5